# Altium PCB PCB1.PcbDoc
Units mm, origin at the board's own origin, x right, y up, seen from the top; angles counter-clockwise.
Board outline 100 x 100 mm, 2 copper layers (Top Layer, Bottom Layer); 16 components, 62 nets, 154 pads, 73 vias.
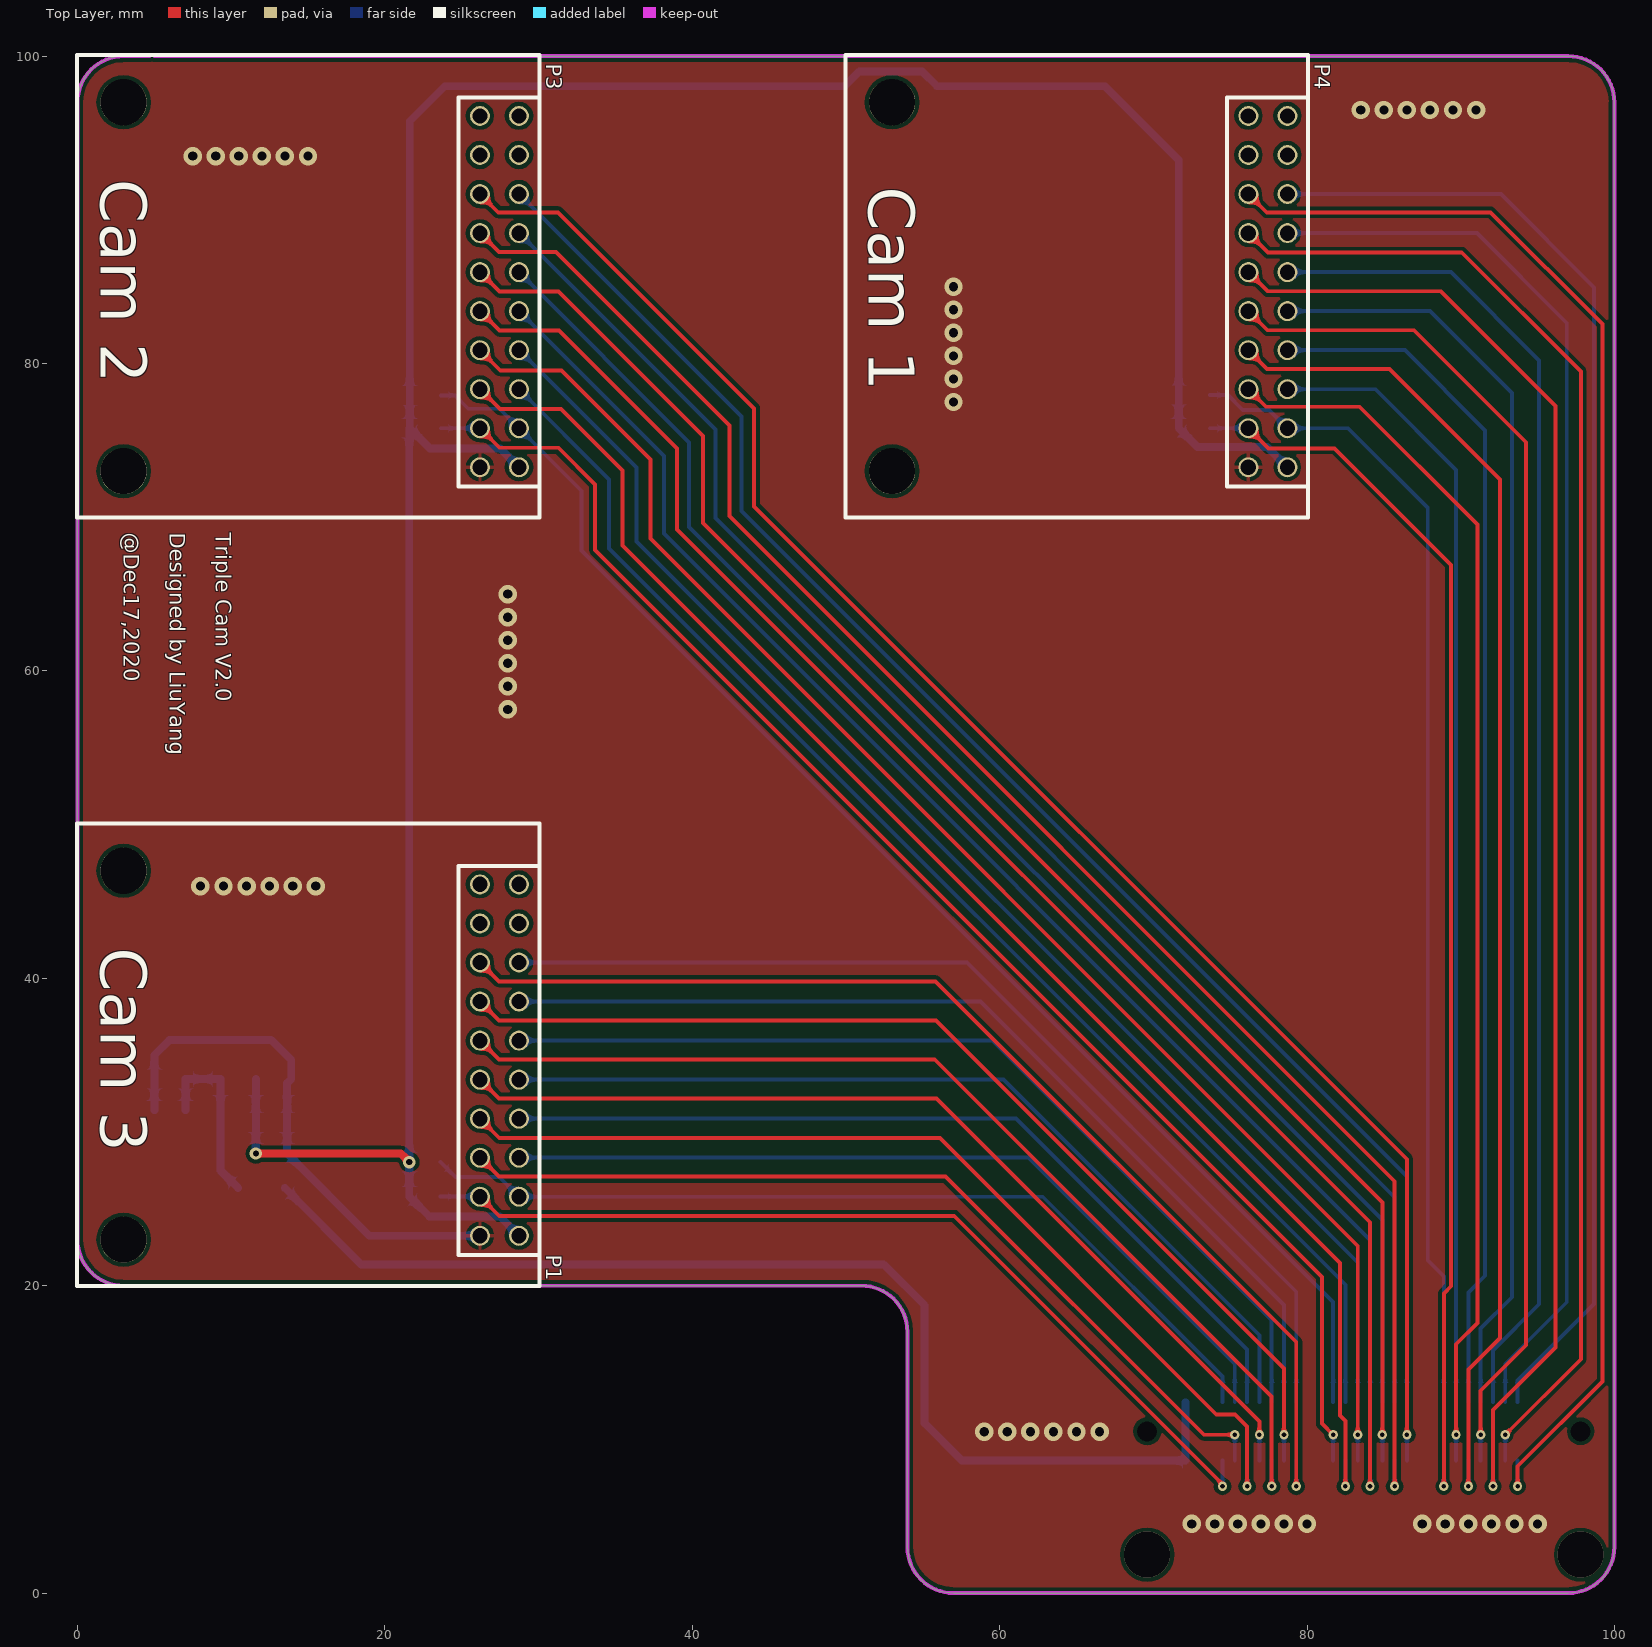
[diagram p0: Top Layer view]
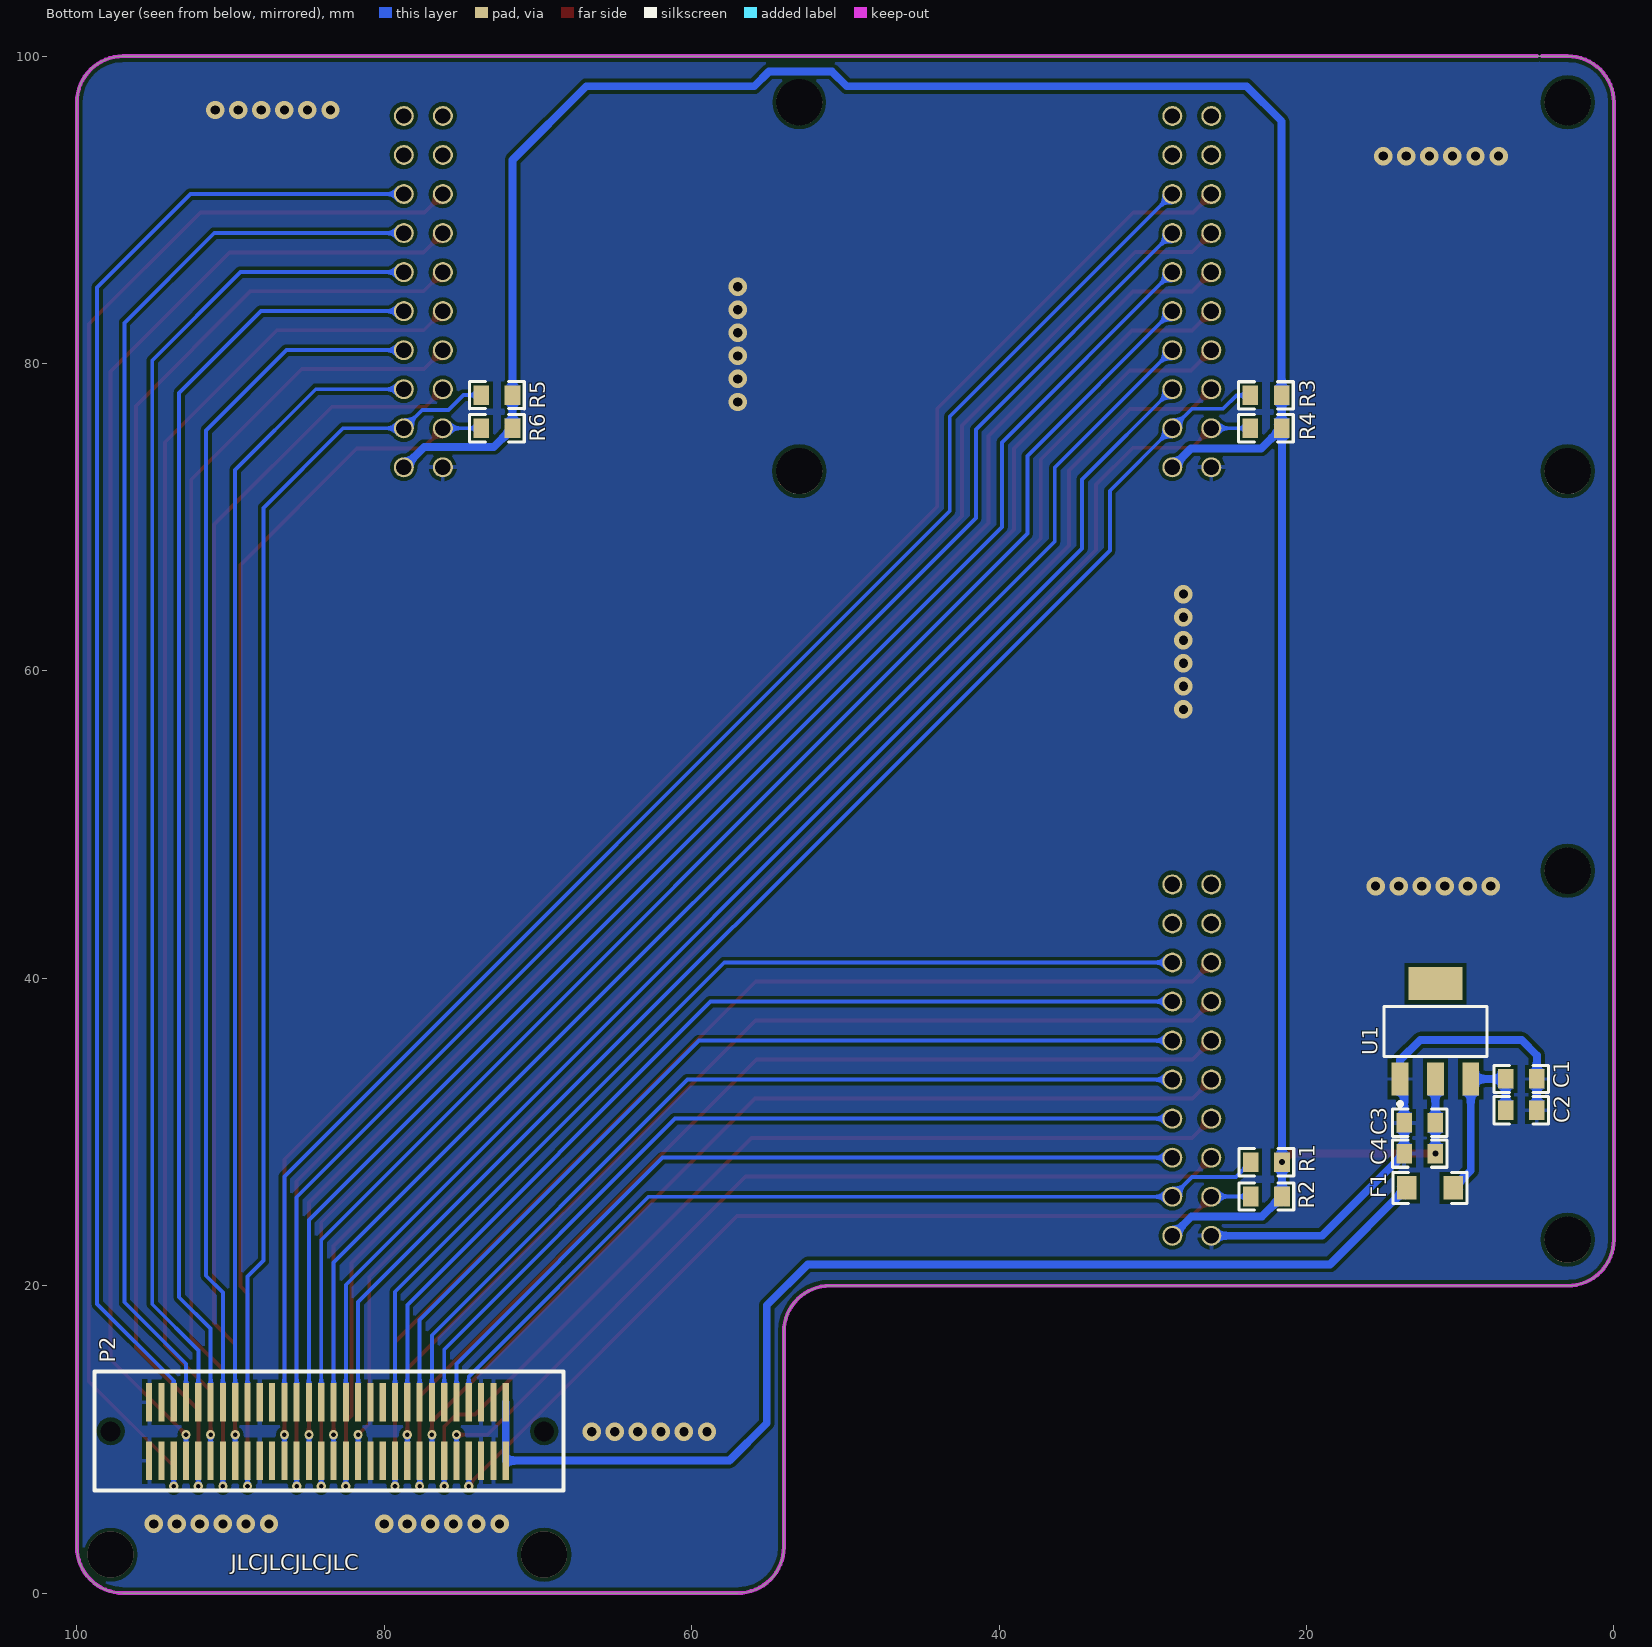
[diagram p1: Bottom Layer view, seen from below]
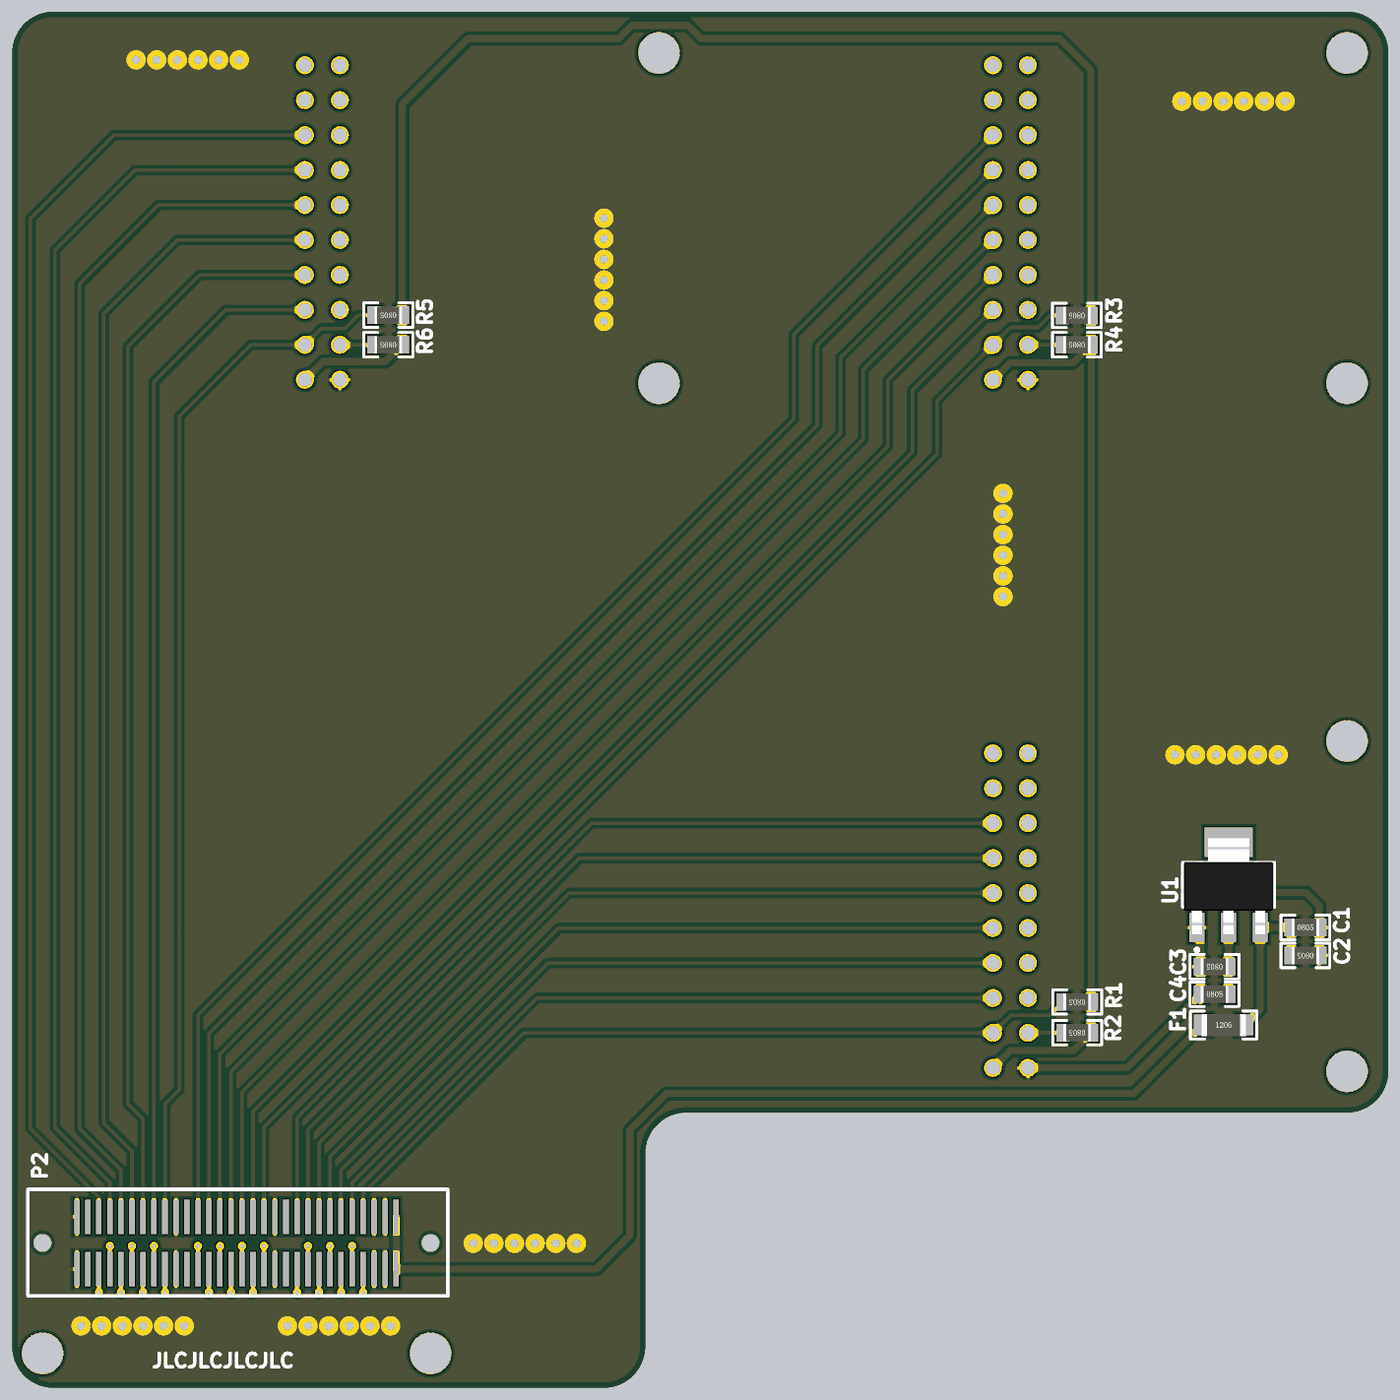
[diagram p2: 3D render of the assembled board from below, using the file's embedded part models]

## Layer stack, top to bottom
Top Solder: solder mask 0.0102, Solder Resist, Dk 3.5
Top Layer: signal copper 0.0356
Dielectric 1: dielectric 0.32, FR-4, Dk 4.8
Bottom Layer: signal copper 0.0356
Bottom Solder: solder mask 0.0102, Solder Resist, Dk 3.5

## Board outline
3,20 cw(c3,23) 0,23 0,97 cw(c3,97) 3,100 97,100 cw(c97,97) 100,97 100,3 cw(c97,3) 97,0 57,0 cw(c57,3) 54,3 54,17 ccw(c51,17) 51,20

## Design rules (kind name [scope] priority, off if disabled: settings)
Clearance [All] p1: gap=0.254 except(0.508: Track-Track)
PolygonConnect [All] p1: connectstyle=Relief reliefconductorwidth=0.254 reliefentries=4 polygonreliefangle="90 Angle" airgapwidth=0.254
RoutingVias [All] p1: holewidth=0.3 width=0.6 viastyle="Through Hole" minholewidth=0.3 minwidth=0.6 maxholewidth=6 maxwidth=10
SolderMaskExpansion [All] p1: expansion=0.102
Width [All] p1: maxlimit=0.508 minlimit=0.127 preferedwidth=0.254
30 further rules are at their usual default settings.

## Classes and differential pairs
net class C1: D0_1 D0_2 D0_3 D1_1 D1_2 D1_3 D2_1 D2_2 D2_3 D3_1 D3_2 D3_3 D4_1 D4_2 D4_3 D5_1 D5_2 D5_3 D6_1 D6_2 D6_3 D7_1 D7_2 D7_3 HS_1 HS_2 HS_3 PCLK_1 PCLK_2 PCLK_3 SCK_1 SCK_2 SCK_3 SDA_1 SDA_2 SDA_3 VS_1 VS_2 VS_3 XCLK_1 XCLK_2 XCLK_3

## Components (designator, comment, footprint, x,y, rotation, side; value= is the part's Value field where it differs from the comment)
C1 "Cap2" R0805 6.02,33.452 r180 bottom
C2 "Cap" R0805 6.02,31.42 r0 bottom
C3 "Cap2" R0805 12.624,30.607 r0 bottom
C4 "Cap" R0805 12.624,28.6 r180 bottom
F1 "Fuse 1" R1206 11.963,26.365 r180 bottom (schematic designator F?)
P1 "Header 10X2" PCBComponent_1 0,20 r90 top locked
P2 "Header 30X2" BTBCON_0.8mm_60P 72.1,12.425 r270 bottom locked
P3 "Header 10X2" PCBComponent_1 0,70 r90 top locked
P4 "Header 10X2" PCBComponent_1 50,70 r90 top locked
R1 "Res1" R0805 22.606,28.042 r0 bottom
R2 "Res1" R0805 22.606,25.806 r0 bottom
R3 "Res1" R0805 22.631,77.927 r0 bottom
R4 "Res1" R0805 22.631,75.794 r0 bottom
R5 "Res1" R0805 72.669,77.953 r0 bottom
R6 "Res1" R0805 72.669,75.794 r0 bottom
U1 "AMS1117-33" "SOT-223   AMS1117" 11.608,36.551 r180 bottom

## Footprints (in the part's own frame and the unit in brackets; to place one, negate y for a bottom-side part, rotate by r counter-clockwise, add the part's x,y. Pads: shape width x height; smd on the part's side, far side on the other; paste and mask are expansions set on the pad)
BTBCON_0.8mm_60P [mm]
  rect 2.5x0.4 smd: 1(0,0) 2(3.8,0) 3(0,-0.8) 4(3.8,-0.8) 5(0,-1.6) 6(3.8,-1.6) 7(0,-2.4) 8(3.8,-2.4) 9(0,-3.2) 10(3.8,-3.2) 11(0,-4) 12(3.8,-4) 13(0,-4.8) 14(3.8,-4.8) 15(0,-5.6) 16(3.8,-5.6) 17(0,-6.4) 18(3.8,-6.4) 19(0,-7.2) 20(3.8,-7.2) 21(0,-8) 22(3.8,-8) 23(0,-8.8) 24(3.8,-8.8) 25(0,-9.6) 26(3.8,-9.6) 27(0,-10.4) 28(3.8,-10.4) 29(0,-11.2) 30(3.8,-11.2) 31(0,-12) 32(3.8,-12) 33(0,-12.8) 34(3.8,-12.8) 35(0,-13.6) 36(3.8,-13.6) 37(0,-14.4) 38(3.8,-14.4) 39(0,-15.2) 40(3.8,-15.2) 41(0,-16) 42(3.8,-16) 43(0,-16.8) 44(3.8,-16.8) 45(0,-17.6) 46(3.8,-17.6) 47(0,-18.4) 48(3.8,-18.4) 49(0,-19.2) 50(3.8,-19.2) 51(0,-20) 52(3.8,-20) 53(0,-20.8) 54(3.8,-20.8) 55(0,-21.6) 56(3.8,-21.6) 57(0,-22.4) 58(3.8,-22.4) 59(0,-23.2) 60(3.8,-23.2)
  round 1 hole 1.3: 61(1.9,2.5) 62(1.9,-25.7)
  silkscreen extent -2,-26.75 5.75,3.75
PCBComponent_1 [mm]
  round 3 hole 3: 0(3,-3) 0(27,-3)
  round 1.3 hole 1: 1(3.251,-28.727) 2(3.251,-26.187) 3(5.791,-28.727) 4(5.791,-26.187) 5(8.331,-28.727) 6(8.331,-26.187) 7(10.871,-28.727) 8(10.871,-26.187) 9(13.411,-28.727) 10(13.411,-26.187) 11(15.951,-28.727) 12(15.951,-26.187) 13(18.491,-28.727) 14(18.491,-26.187) 15(21.031,-28.727) 16(21.031,-26.187) 17(23.571,-28.727) 18(23.571,-26.187) 19(26.111,-28.727) 20(26.111,-26.187)
  silkscreen extent -0.01,-30.06 30.09,0.04
R0805 [mil]
  rect 40x50 smd: 1(-40,0) 2(40,0)
  silkscreen extent -70,-35 70,35, body extent -39,-25 39,25, height 22
R1206 [mil]
  rect 50x60 smd: 1(-60,0) 2(60,0)
  silkscreen extent -95,-40 95,40, body extent -63,-31 63,31, height 24
"SOT-223   AMS1117" [mm] "SOT-223/SC-73; 4 Leads; Body 6.7 x 7.3 mm, inc. leads (LxW max)"
  rect 1.1x2.15 smd: 1(-2.3,-3.1) 2(0,-3.1) 3(2.3,-3.1)
  rect 3.5x2.15 smd: 4(0,3.1)
  silkscreen extent -3.35,-4.85 3.35,1.63, body extent -3.25,-3.58 3.25,3.38, height 1.65

## Part data
C1 C2 C3 C4: "Capacitor"
F1: "Fuse"
P1 P3 P4: "Header, 10-Pin, Dual row"
P2: "Header, 30-Pin, Dual row"
R1 R2 R3 R4 R5 R6: "Resistor"
U1: library part "Volt Reg", "Voltage Regulator"

## Via types
v1: diameter 1.2, hole 0.6, Top Layer to Bottom Layer, 48 vias
v2: diameter 0.6, hole 0.3, Top Layer to Bottom Layer, 21 vias
v3: diameter 3, hole 3, Top Layer to Bottom Layer, 2 vias
v4: diameter 0.8, hole 0.4, Top Layer to Bottom Layer, 2 vias

## Nets (pads, with @x,y where several pads share a name; then routed paths per layer and width w, separated by ;. In a path a pad name is that pad's centre, name@x,y a point inside that pad or via, vN(x,y) a via of type N, cw(c..) or ccw(c..) an arc to the next point about the centre after c; other vN are vias at no path point)
3V3: C3.1 C4.2 P1.1 P3.1 P4.1 R1.1 R2.1 R3.1 R4.1 R5.1 R6.1 U1.2 | length 180.7
  Top Layer w0.508: v4(11.608,28.6) 21.031,28.6 v4(21.59,28.042)
  Bottom Layer w0.508: v4(11.608,28.6) U1.2 ; P1.1 27.468,24.511 22.885,24.511 R2.1 v4(21.59,28.042) 21.59,75.768 R4.1 ; P3.1 27.506,74.473 22.936,74.473 R4.1 ; P4.1 77.404,74.574 72.873,74.574 R6.1 R5.1 71.653,93.247 66.856,98.044 55.931,98.044 54.967,99.008 50.875,99.008 49.911,98.044 23.901,98.044 21.615,95.758 R3.1 R4.1
5V: F1.1 P2.1 P2.2 | length 74.3
  Bottom Layer w0.508: F1.1 18.466,21.387 52.451,21.387 55.118,18.72 55.118,11.049 57.542,8.625 P2.2 P2.1
D0_1: P1.16 P2.20 | length 74.4
  Top Layer w0.254: P1.16 27.417,39.802 55.829,39.802 79.3,16.331 v2(79.3,6.948)
  Bottom Layer w0.254: v2(79.3,6.948) P2.20
D0_2: P2.38 P3.16 | length 109.7
  Top Layer w0.254: P3.16 27.379,89.84 31.267,89.84 44.018,77.089 44.018,70.714 86.5,28.232 86.5,21.341 v2(86.5,10.302)
  Bottom Layer w0.254: P2.38 v2(86.5,10.302)
D0_3: P2.56 P4.16 | length 106.1
  Top Layer w0.254: P4.16 77.379,89.84 91.948,89.84 99.225,82.563 99.225,13.779 93.7,8.254 v2(93.7,6.948)
  Bottom Layer w0.254: v2(93.7,6.948) P2.56
D1_1: P1.15 P2.19 | length 66.6
  Bottom Layer w0.254: P1.15 57.876,41.031 79.3,19.608 P2.19
D1_2: P2.37 P3.15 | length 102.5
  Bottom Layer w0.254: P3.15 43.205,76.553 43.205,70.409 86.5,27.114 P2.37
D1_3: P2.55 P4.15 | length 97.1
  Bottom Layer w0.254: P4.15 92.611,91.031 98.679,84.963 98.679,18.821 93.7,13.842 P2.55
D2_1: P1.14 P2.18 | length 68.2
  Top Layer w0.254: P1.14 27.417,37.262 55.855,37.262 78.5,14.616 v2(78.5,10.302)
  Bottom Layer w0.254: P2.18 v2(78.5,10.302)
D2_2: P2.36 P3.14 | length 110
  Top Layer w0.254: P3.14 27.43,87.249 31.14,87.249 42.418,75.971 42.418,70.079 85.7,26.797 v2(85.7,6.948)
  Bottom Layer w0.254: v2(85.7,6.948) P2.36
D2_3: P2.54 P4.14 | length 98.2
  Top Layer w0.254: P4.14 77.455,87.224 90.068,87.224 97.815,79.477 97.815,15.217 v2(92.9,10.302)
  Bottom Layer w0.254: P2.54 v2(92.9,10.302)
D3_1: P1.13 P2.17 | length 64.3
  Bottom Layer w0.254: P1.13 58.765,38.491 78.5,18.757 P2.17
D3_2: P2.35 P3.13 | length 99.7
  Bottom Layer w0.254: P3.13 41.504,75.715 41.504,69.952 85.7,25.755 P2.35
D3_3: P2.53 P4.13 | length 92.5
  Bottom Layer w0.254: P4.13 91.061,88.491 96.901,82.652 96.901,18.923 92.9,14.922 P2.53
D4_1: P1.12 P2.16 | length 68.6
  Top Layer w0.254: P1.12 27.417,34.722 55.778,34.722 77.7,12.8 v2(77.7,6.948)
  Bottom Layer w0.254: v2(77.7,6.948) P2.16
D4_2: P2.34 P3.12 | length 103.9
  Top Layer w0.254: P3.12 27.455,84.684 31.293,84.684 40.691,75.286 40.691,69.621 84.9,25.412 v2(84.9,10.302)
  Bottom Layer w0.254: P2.34 v2(84.9,10.302)
D4_3: P2.52 P4.12 | length 97.2
  Top Layer w0.254: P4.12 77.43,84.709 88.697,84.709 96.164,77.241 96.164,15.977 92.1,11.912 v2(92.1,6.948)
  Bottom Layer w0.254: v2(92.1,6.948) P2.52
D5_1: P1.11 P2.15 | length 61.9
  Bottom Layer w0.254: P1.11 59.527,35.951 77.7,17.779 P2.15
D5_2: P2.33 P3.11 | length 96.8
  Bottom Layer w0.254: P3.11 39.802,74.877 39.802,69.367 84.9,24.269 P2.33
D5_3: P2.51 P4.11 | length 87.8
  Bottom Layer w0.254: P4.11 89.36,85.951 95.098,80.213 95.098,18.796 92.1,15.798 P2.51
D6_1: P1.10 P2.14 | length 62.5
  Top Layer w0.254: P1.10 27.417,32.182 55.88,32.182 76.9,11.162 v2(76.9,10.302)
  Bottom Layer w0.254: P2.14 v2(76.9,10.302)
D6_2: P2.32 P3.10 | length 104.4
  Top Layer w0.254: P3.10 27.455,82.144 31.344,82.144 39.014,74.473 39.014,69.215 84.1,24.129 v2(84.1,6.948)
  Bottom Layer w0.254: v2(84.1,6.948) P2.32
D6_3: P2.50 P4.10 | length 89.1
  Top Layer w0.254: P4.10 77.43,82.169 86.97,82.169 94.259,74.879 94.259,16.129 91.3,13.17 v2(91.3,10.302)
  Bottom Layer w0.254: P2.50 v2(91.3,10.302)
D7_1: P1.9 P2.13 | length 59.4
  Bottom Layer w0.254: P1.9 60.264,33.411 76.9,16.775 P2.13
D7_2: P2.31 P3.9 | length 93.9
  Bottom Layer w0.254: P3.9 38.151,73.988 38.151,68.936 84.1,22.986 P2.31
D7_3: P2.49 P4.9 | length 83.3
  Bottom Layer w0.254: P4.9 88.013,83.411 93.345,78.08 93.345,19.253 91.3,17.208 P2.49
FREX_1: P1.19
FREX_2: P3.19
FREX_3: P4.19
GND: C1.2 C2.1 C3.2 C4.1 P1.2 P2.3 P2.4 P2.5 P2.6 P2.23 P2.24 P2.41 P2.42 P2.59 P2.60 P3.2 P4.2 U1.1 | length 34.4
  Bottom Layer w0.508: C2.1 C1.2 5.004,35.001 5.994,35.992 12.598,35.992 13.908,34.682 U1.1 13.64,33.183 C3.2 C4.1 18.989,23.251 P1.2
  other v1: 72.5,4.5 74,4.5 75.5,4.5 77,4.5 78.5,4.5 80,4.5 87.5,4.5 89,4.5 90.5,4.5 92,4.5 93.5,4.5 95,4.5 59,10.5 60.5,10.5 62,10.5 63.5,10.5 65,10.5 66.5,10.5 8,46 9.5,46 11,46 12.5,46 14,46 15.5,46 28,57.5 28,59 28,60.5 28,62 28,63.5 28,65 57,77.5 57,79 57,80.5 57,82 57,83.5 57,85 7.5,93.5 9,93.5 10.5,93.5 12,93.5 13.5,93.5 15,93.5 83.5,96.5 85,96.5 86.5,96.5 88,96.5 89.5,96.5 91,96.5
HS_1: P1.6 P2.10 | length 58.3
  Top Layer w0.254: P1.6 27.417,27.102 56.49,27.102 73.289,10.302 v2(75.3,10.302)
  Bottom Layer w0.254: P2.10 v2(75.3,10.302)
HS_2: P2.28 P3.6 | length 98.7
  Top Layer w0.254: P3.6 27.48,77.038 31.471,77.038 35.458,73.05 35.458,68.174 82.144,21.488 82.144,11.557 82.5,11.201 v2(82.5,6.948)
  Bottom Layer w0.254: v2(82.5,6.948) P2.28
HS_3: P2.46 P4.6 | length 80
  Top Layer w0.254: P4.6 77.328,77.191 83.414,77.191 91.084,69.52 91.084,17.577 89.7,16.192 v2(89.7,10.302)
  Bottom Layer w0.254: P2.46 v2(89.7,10.302)
NetC1_1: C1.1 C2.2 F1.2 U1.3 | length 11.9
  Bottom Layer w0.508: C2.2 C1.1 U1.3 U1.3 9.308,27.497 F1.2
PCLK_1: P1.7 P2.11 | length 57
  Bottom Layer w0.254: P1.7 61.077,30.871 76.1,15.848 P2.11
PCLK_2: P2.29 P3.7 | length 91.1
  Bottom Layer w0.254: P3.7 36.373,73.226 36.373,68.428 83.3,21.5 P2.29
PCLK_3: P2.47 P4.7 | length 78.7
  Bottom Layer w0.254: P4.7 86.362,80.871 91.592,75.641 91.592,20.65 90.5,19.558 P2.47
PWDN_1: P1.18
PWDN_2: P3.18
PWDN_3: P4.18
RST_1: P1.17
RST_2: P3.17
RST_3: P4.17
SCK_1: P1.3 P2.7 R1.2 | length 58.3
  Bottom Layer w0.254: R1.2 24.587,27.076 27.442,27.076 P1.3 62.804,25.791 74.5,14.095 P2.7
SCK_2: P2.25 P3.3 R3.2 | length 91.3
  Bottom Layer w0.254: R3.2 24.562,77.927 25.425,77.064 27.455,77.064 P3.3 32.791,71.727 32.791,67.843 81.7,18.935 P2.25
SCK_3: P2.43 P4.3 R5.2 | length 75.8
  Bottom Layer w0.254: R5.2 74.854,77.953 75.819,76.987 77.531,76.987 P4.3 82.679,75.791 87.859,70.612 87.859,21.641 88.9,20.599 P2.43
SDA_1: P1.4 P2.8 R2.2 | length 60.4
  Top Layer w0.254: P1.4 27.442,24.536 57.047,24.536 74.5,7.083 v2(74.5,6.948)
  Bottom Layer w0.254: R2.2 26.172,25.806 P1.4 ; v2(74.5,6.948) P2.8
SDA_2: P2.26 P3.4 R4.2 | length 94.9
  Top Layer w0.254: P3.4 27.455,74.524 31.293,74.524 33.68,72.136 33.68,67.869 80.975,20.574 80.975,11.027 v2(81.7,10.302)
  Bottom Layer w0.254: R4.2 26.185,75.794 P3.4 ; P2.26 v2(81.7,10.302)
SDA_3: P2.44 P4.4 R6.2 | length 81.2
  Top Layer w0.254: P4.4 77.506,74.473 81.788,74.473 89.357,66.904 89.357,19.964 88.9,19.507 v2(88.9,6.948)
  Bottom Layer w0.254: R6.2 76.185,75.794 P4.4 ; v2(88.9,6.948) P2.44
STRO_1: P1.20
STRO_2: P3.20
STRO_3: P4.20
T10: P2.58
T11: P2.57
V16: P2.39
VS_1: P1.5 P2.9 | length 54.6
  Bottom Layer w0.254: P1.5 61.89,28.331 75.3,14.921 P2.9
VS_2: P2.27 P3.5 | length 88.2
  Bottom Layer w0.254: P3.5 34.595,72.464 34.595,67.97 82.5,20.065 P2.27
VS_3: P2.45 P4.5 | length 73.8
  Bottom Layer w0.254: P4.5 84.457,78.331 89.7,73.089 P2.45
W16: P2.40
XCLK_1: P1.8 P2.12 | length 63.8
  Top Layer w0.254: P1.8 27.442,29.616 56.109,29.616 74.092,11.633 75.311,11.633 76.1,10.844 v2(76.1,6.948)
  Bottom Layer w0.254: v2(76.1,6.948) P2.12
XCLK_2: P2.30 P3.8 | length 98.2
  Top Layer w0.254: P3.8 27.506,79.553 31.496,79.553 37.287,73.762 37.287,68.605 83.3,22.593 v2(83.3,10.302)
  Bottom Layer w0.254: P2.30 v2(83.3,10.302)
XCLK_3: P2.48 P4.8 | length 87.9
  Top Layer w0.254: P4.8 77.404,79.654 85.369,79.654 92.558,72.466 92.558,16.612 90.5,14.554 v2(90.5,6.948)
  Bottom Layer w0.254: v2(90.5,6.948) P2.48
pads on no net: P1.0 P2.21 P2.22 P2.61 P2.62 P3.0 P4.0 U1.4
copper on no net:
  other v3: 69.6,2.5 97.8,2.5

## Polygon pours and split planes (outlines as drawn)
GND on Top Layer "Top Layer-No Net" (solid, remove dead copper, pour order 10): -5.725,104.9 114.425,104.9 116.55,102.775 104.65,90.875 104.65,-10.3 -5.9,-10.3 -15.1,-1.1
GND on Bottom Layer "Top Layer-No Net" (solid, remove dead copper, pour order 12): -8.15,105.05 -7.15,104.05 115.15,104.05 115.15,-7.325 109.9,-12.575 107.075,-15.4 36.075,-15.4 6.875,-15.4 -11.125,2.6

## Keep-outs
Keep-Out Layer:
  lines w0.254: 4.675,100 3,100 ccw(c3,97) 0,97 0,23 ccw(c3,23) 3,20 51,20 cw(c51,17) 54,17 54,3 ccw(c57,3) 57,0 97,0 ccw(c97,3) 100,3 100,97 ccw(c97,97) 97,100 ; 5,100 97,100 ; 93,100 97,100

## Silkscreen, mask and mechanical layers (free items; w line width, h text height)
Top Overlay:
  text "Cam 2" at 1.5,92 h3 r270
  text "Cam 1" at 51.5,91.5 h3 r270
  text "@Dec17,2020" at 3,69 h1 r270
  text "Designed by LiuYang" at 6,69 h1 r270
  text "Triple Cam V2.0" at 9,69 h1 r270
  text "Cam 3" at 1.5,42 h3 r270
Bottom Overlay:
  text "JLCJLCJLCJLC" at 90,1.5 h1
Mechanical 1:
  lines w0.254: 0,23 ccw(c3,23) 3,20 51,20 cw(c51,17) 54,17 54,13 54,10 54,3 ccw(c57,3) 57,0 70,0 97,0 ccw(c97,3) 100,3 100,97 ccw(c97,97) 97,100 3,100 ccw(c3,97) 0,97 0,23